# Altium PCB PCB1.PcbDoc
Units mm, origin at the board's own origin, x right, y up, seen from the top; angles counter-clockwise.
Board outline 38.5 x 20.5 mm, 2 copper layers (Top Layer, Bottom Layer); 6 components, 5 nets, 11 pads, 5 vias.
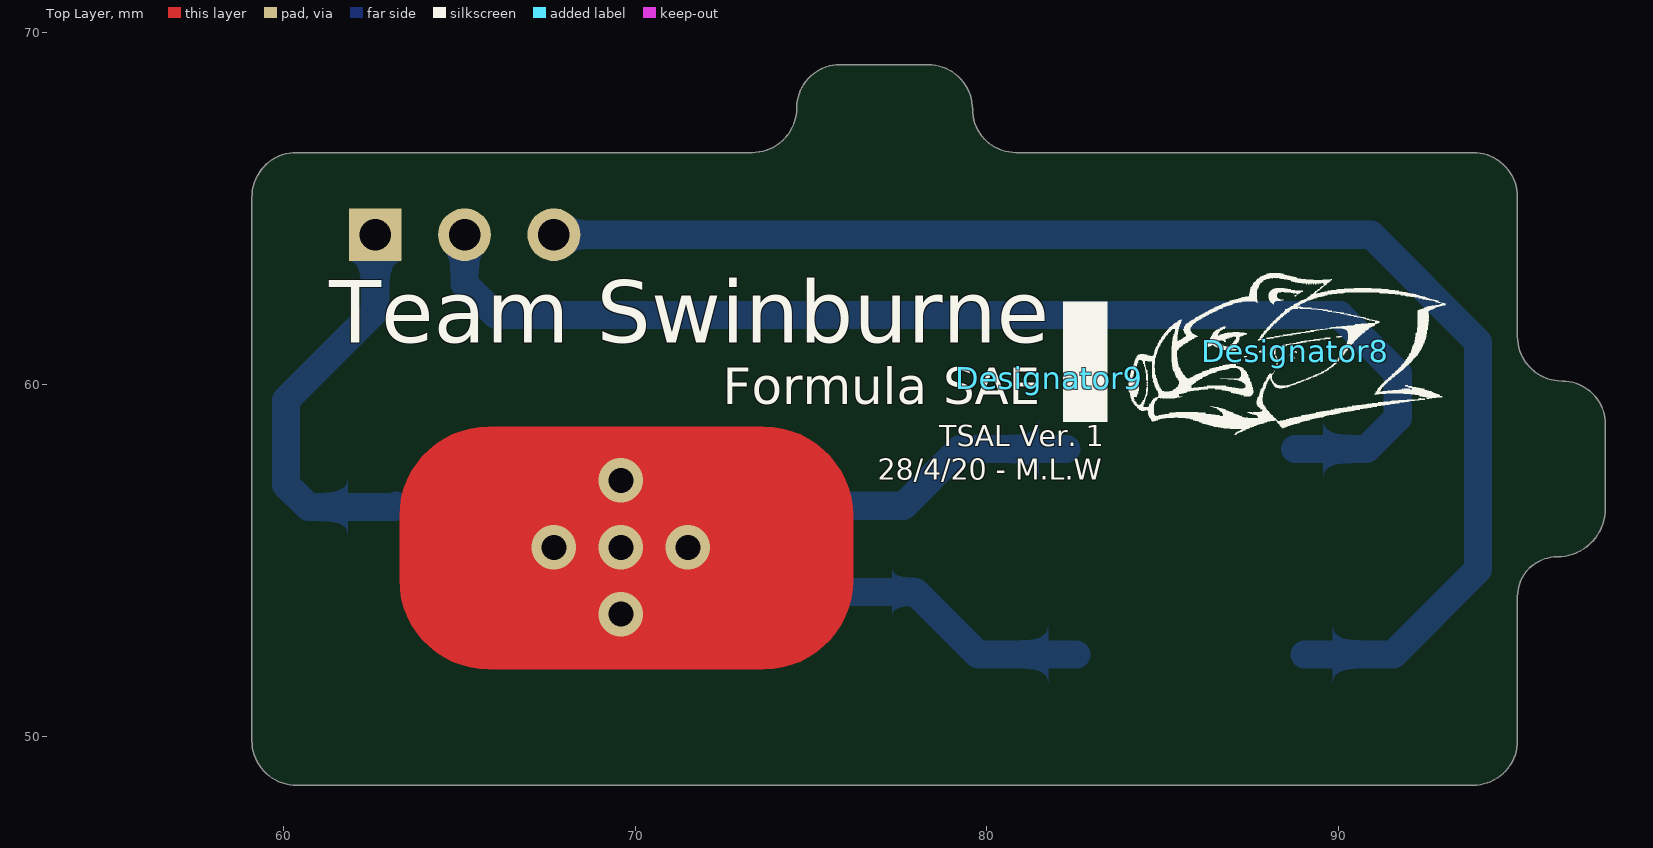
[diagram p0: Top Layer view]
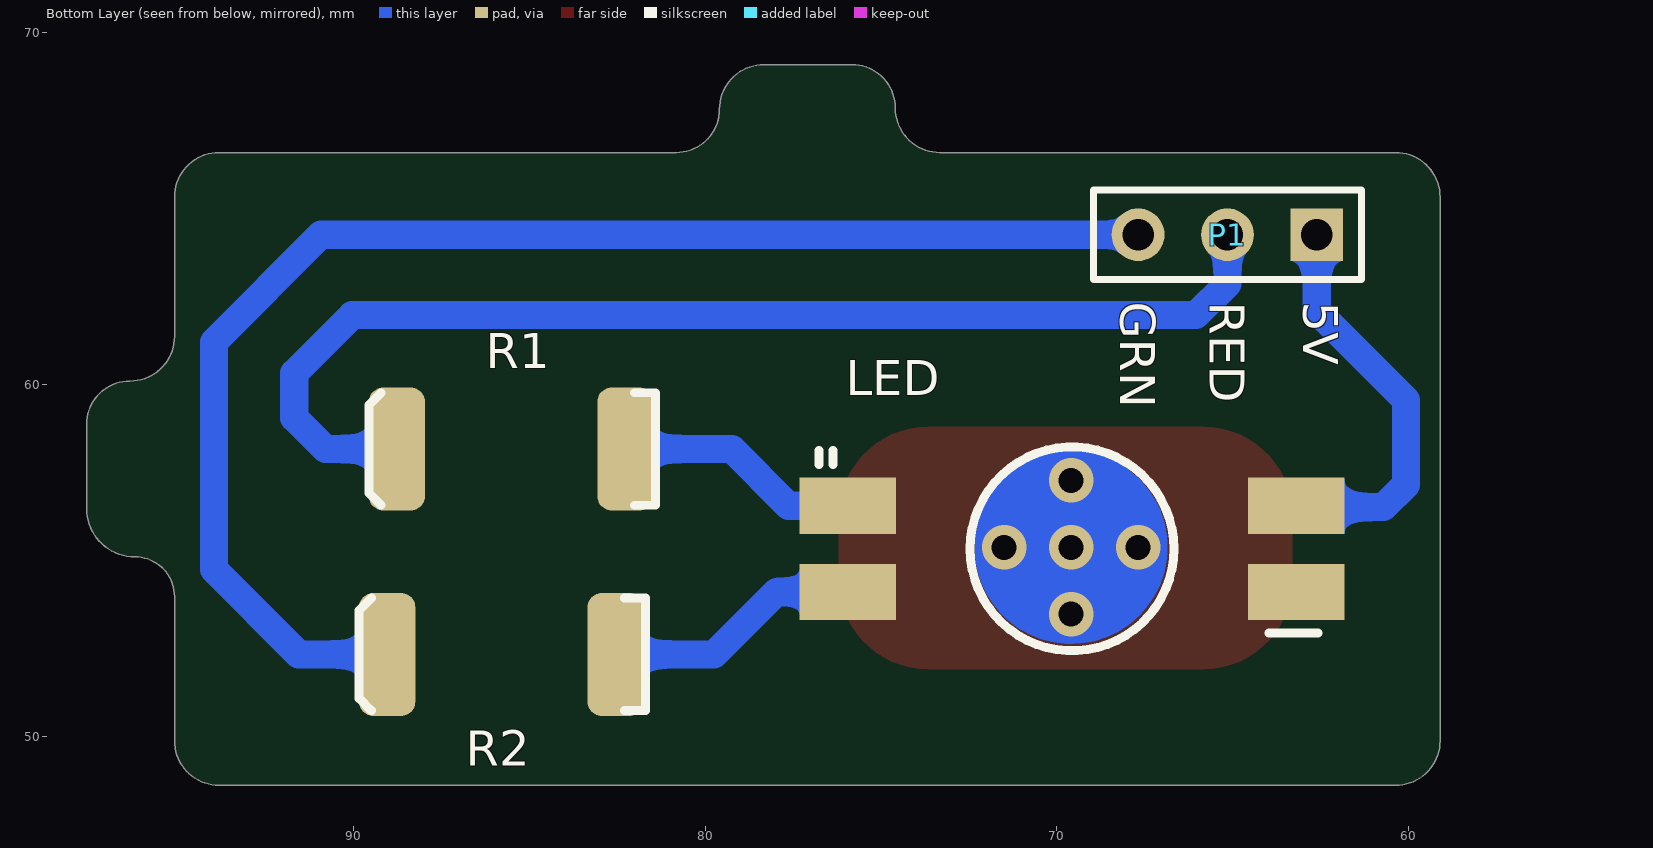
[diagram p1: Bottom Layer view, seen from below]

## Layer stack, top to bottom
Top Solder: solder mask 0.0102, Solder Resist, Dk 3.5
Top Layer: signal copper 0.0356
Dielectric 1: dielectric 0.32, FR-4, Dk 4.8
Bottom Layer: signal copper 0.0356
Bottom Solder: solder mask 0.0102, Solder Resist, Dk 3.5

## Board outline
59.1,49.87 ccw(c60.37,49.87) 60.37,48.6 93.83,48.6 ccw(c93.83,49.87) 95.1,49.87 95.1,53.97 cw(c96.23,53.97) 96.23,55.1 ccw(c96.23,56.47) 97.6,56.47 97.6,58.87 ccw(c96.37,58.87) 96.37,60.1 cw(c96.37,61.37) 95.1,61.37 95.1,65.33 ccw(c93.83,65.33) 93.83,66.6 80.83,66.6 cw(c80.83,67.83) 79.6,67.83 ccw(c78.33,67.83) 78.33,69.1 75.83,69.1 ccw(c75.83,67.87) 74.6,67.87 cw(c73.33,67.87) 73.33,66.6 60.37,66.6 ccw(c60.37,65.33) 59.1,65.33

## Design rules (kind name [scope] priority, off if disabled: settings)
Clearance [All] p1: gap=0.254 ignorepadtopadclearanceinfootprint=FALSE except(0: Arc-Hole Track-Hole SMDPad-Hole THPad-Hole Via-Hole Fill-Hole Poly-Hole Region-Hole Text-Hole)
PolygonConnect [All] p1: connectstyle=Relief reliefconductorwidth=0.254 reliefentries=4 polygonreliefangle="90 Angle" airgapwidth=0.254
RoutingVias [All] p1: holewidth=0.711 width=1.27 viastyle="Through Hole" minholewidth=0.711 minwidth=1.27 maxholewidth=0.711 maxwidth=1.27
SolderMaskExpansion [All] p1: expansion=0.102 istentingtop=FALSE
Width [All] p1: maxlimit=3 minlimit=0.254 preferedwidth=0.254
30 further rules are at their usual default settings.

## Components (designator, comment, footprint, x,y, rotation, side; value= is the part's Value field where it differs from the comment)
Designator8 "Comment" "THE PIG" 88.773,60.96 r0 top
Designator9 "Comment" "Team Swinburne Small" 81.788,60.198 r0 top
LED "G" "HOTRED RGB_LED" 69.571,55.327 r180 bottom (schematic designator G1)
P1 "2.54mm" "TH 2.54mm Header 1x3" 62.611,64.262 r0 bottom
R1 "15R" 2512 82.273,58.166 r0 bottom
R2 "10R" 2512 82.55,52.324 r0 bottom

## Footprints (in the part's own frame and the unit in brackets; to place one, negate y for a bottom-side part, rotate by r counter-clockwise, add the part's x,y. Pads: shape width x height; smd on the part's side, far side on the other; paste and mask are expansions set on the pad)
2512 [mm]
  rrect50% 1.6x3.5 smd: 1(0,0) 2(6.5,0)
  silkscreen extent -0.85,-1.6 7.3,1.6, body extent 0.1,-1.6 6.4,1.6, height 0.7
"HOTRED RGB_LED" [mm] "4-pin, 3W SMD LED, 350mA, Vr = 2.2, Vg = 3.4, Vb = 3.4"
  rect 2.75x1.6 smd: A(6.375,1.225) B(6.375,-1.225) G(-6.375,-1.225) R(-6.375,1.225)
  silkscreen extent -7.2,-2.9 7,2.9
"Team Swinburne Small" [mm]
  silkscreen extent 0.38,-1.27 1.65,2.16
"TH 2.54mm Header 1x3" [mm]
  rect 1.5x1.5 hole 0.9: 1(0,0)
  round 1.5 hole 0.9: 2(2.54,0) 3(5.08,0)
  silkscreen extent -1.27,-1.27 6.35,1.27
"THE PIG" [mm]
  silkscreen extent -4.73,-2.39 4.29,2.2

## Part data
LED: library part "LED - RGB (Anode Common)"
P1: library part "TH 2.54mm Header 1x3", Angle=0, Contact=NA, Flange=No, Part Number="TH 2.54mm Header 1x3", Pitch=2.54mm, Positions=3, Row Spacing=2.54mm
R1: library part 352115RFT, Digikey Part Number=A115988CT-ND, Manufacturer="TE Connectivity", Rated Voltage=2W, Tolerance=0.01, Part Number=352115RFT
R2: library part 352110RFT, Digikey Part Number=A115984CT-ND, Manufacturer="TE Connectivity", Rated Voltage=2W, Tolerance=0.01, Part Number=352110RFT

## Via types
v1: diameter 1.27, hole 0.711, Top Layer to Bottom Layer, 5 vias

## Nets (pads, with @x,y where several pads share a name; then routed paths per layer and width w, separated by ;. In a path a pad name is that pad's centre, name@x,y a point inside that pad or via, vN(x,y) a via of type N, cw(c..) or ccw(c..) an arc to the next point about the centre after c; other vN are vias at no path point)
"Anode 5V": LED.A P1.1 | length 11.6
  Bottom Layer w0.8: P1.1 62.611,62.103 60.071,59.563 60.071,57.15 60.706,56.515 63.159,56.515 LED.A
Green: P1.3 R2.2 | length 40
  Bottom Layer w0.8: P1.3 90.932,64.262 93.98,61.214 93.98,54.737 91.567,52.324 R2.2
NetG1_G: LED.G R2.1 | length 7.3
  Bottom Layer w0.8: LED.G 77.978,54.102 79.756,52.324 R2.1
NetG1_R: LED.R R1.1 | length 7
  Bottom Layer w0.8: LED.R 77.634,56.552 79.248,58.166 R1.1
Red: P1.2 R1.2 | length 33.6
  Bottom Layer w0.8: P1.2 65.151,62.865 66.04,61.976 90.043,61.976 91.694,60.325 91.694,59.055 90.805,58.166 R1.2
pads on no net: LED.B
copper on no net: | length 9.4
  Bottom Layer w2.5: v1@71.096,55.372 ccw(c69.596,55.372) v1@71.096,55.372
  other v1: 69.596,53.467 67.691,55.372 69.596,55.372 71.501,55.372 69.596,57.277

## Polygon pours and split planes (outlines as drawn)
no net on Top Solder "NONET_L-01_P-001" (solid): 63.3,56.26 cw(c65.84,56.26) 65.84,58.8 73.656,58.8 cw(c73.66,56.26) 76.2,56.26 76.2,54.44 cw(c73.66,54.44) 73.66,51.9 65.84,51.9 cw(c65.84,54.44) 63.3,54.44

## Other copper
Top Layer:
  region: 76.2,56.26 ccw(c73.66,56.26) 73.66,58.8 65.84,58.8 ccw(c65.84,56.26) 63.3,56.26 63.3,54.44 ccw(c65.84,54.44) 65.84,51.9 73.66,51.9 ccw(c73.66,54.44) 76.2,54.44
  region: 54.4,56.4
  region: 86.6,55.1

## Silkscreen, mask and mechanical layers (free items; w line width, h text height)
Bottom Overlay:
  text "5V" at 62.992,62.357 h1 r90
  text "RED" at 65.659,62.357 h1 r90
  text "GRN" at 68.199,62.357 h1 r90
Bottom Solder:
  circle w2.5: c69.596,55.372 r1.4
Drill Drawing:
  circle w0.254: c61.456,78.59 r0.847
  lines w0.254: 59.1,49.87 ccw(c60.37,49.87) 60.37,48.6 93.83,48.6 ccw(c93.83,49.87) 95.1,49.87 95.1,53.97 cw(c96.23,53.97) 96.23,55.1 ccw(c96.23,56.47) 97.6,56.47 97.6,58.87 ccw(c96.37,58.87) 96.37,60.1 cw(c96.37,61.37) 95.1,61.37 95.1,65.33 ccw(c93.83,65.33) 93.83,66.6 80.83,66.6 cw(c80.83,67.83) 79.6,67.83 ccw(c78.33,67.83) 78.33,69.1 75.83,69.1 ccw(c75.83,67.87) 74.6,67.87 cw(c73.33,67.87) 73.33,66.6 67.2,66.6 60.37,66.6 ccw(c60.37,65.33) 59.1,65.33 59.1,49.87 ; 60.609,81.553 62.303,81.553 62.303,83.247 60.609,83.247 60.609,81.553
  lines w0.381: 59.09,76.6 323.787,76.6 ; 59.09,84.22 323.787,84.22 ; 73.083,72.79 73.083,88.03 ; 85.272,72.79 85.272,88.03 ; 113.204,72.79 113.204,88.03 ; 126.053,72.79 126.053,88.03 ; 144.691,72.79 144.691,88.03 ; 182.78,72.79 182.78,88.03 ; 197.762,72.79 197.762,88.03 ; 216.705,72.79 216.705,88.03 ; 233.211,72.79 233.211,88.03 ; 254.897,72.79 254.897,88.03 ; 288.77,72.79 288.77,88.03 ; 59.09,72.79 323.787,72.79 323.787,88.03 59.09,88.03 59.09,72.79
  text "Symbol" at 61.376,85.363 h1.83
  text "Count" at 74.226,85.363 h1.83
  text "Hole Size" at 86.415,85.363 h1.83
  text "Plated" at 114.347,85.363 h1.83
  text "Hole Type" at 127.196,85.363 h1.83
  text "Drill Layer Pair" at 145.834,85.363 h1.83
  text "Via/Pad" at 183.923,85.363 h1.83
  text "Pad Shape" at 198.905,85.363 h1.83
  text "Template" at 217.848,85.363 h1.83
  text "Description" at 234.354,85.363 h1.83
  text "Hole Tolerance (+)" at 256.04,85.363 h1.83
  text "Hole Tolerance (-)" at 289.913,85.363 h1.83
  text "3" at 74.226,81.553 h1.52
  text "0.900mm (35.43mil)" at 86.415,81.553 h1.52
  text "PTH" at 114.347,81.553 h1.52
  text "Round" at 127.196,81.553 h1.52
  text "Top Layer - Bottom Layer" at 145.834,81.553 h1.52
  text "Pad" at 183.923,81.553 h1.52
  text "(Mixed)" at 198.905,81.553 h1.52
  text "(Mixed)" at 217.848,81.553 h1.52
  text "5" at 74.226,77.743 h1.52
  text "0.711mm (28.00mil)" at 86.415,77.743 h1.52
  text "PTH" at 114.347,77.743 h1.52
  text "Round" at 127.196,77.743 h1.52
  text "Top Layer - Bottom Layer" at 145.834,77.743 h1.52
  text "Via" at 183.923,77.743 h1.52
  text "Rounded" at 198.905,77.743 h1.52
  text "v127h71" at 217.848,77.743 h1.52
  text "8 Total" at 74.226,73.933 h1.52

## Text inside footprints (layer, text, board x,y; h text height)
Designator9: Top Overlay "28/4/20 - M.L.W" at 76.9,57.1 h1.02; Top Overlay "Formula SAE" at 72.5,59.1 h1.78; Top Overlay "Team Swinburne" at 61.3,60.6 h3.05; Top Overlay "TSAL Ver. 1" at 78.65,58.039 h1.02